# Altium PCB WX0.011.753PCB.PcbDoc
Units mm, origin at the board's own origin, x right, y up, seen from the top; angles counter-clockwise.
Board outline 56.82 x 33.38 mm, 2 copper layers (Top Layer, Bottom Layer); 24 components, 12 nets, 46 pads, 66 vias.
Unrouted connection lines stored in the file: 1.
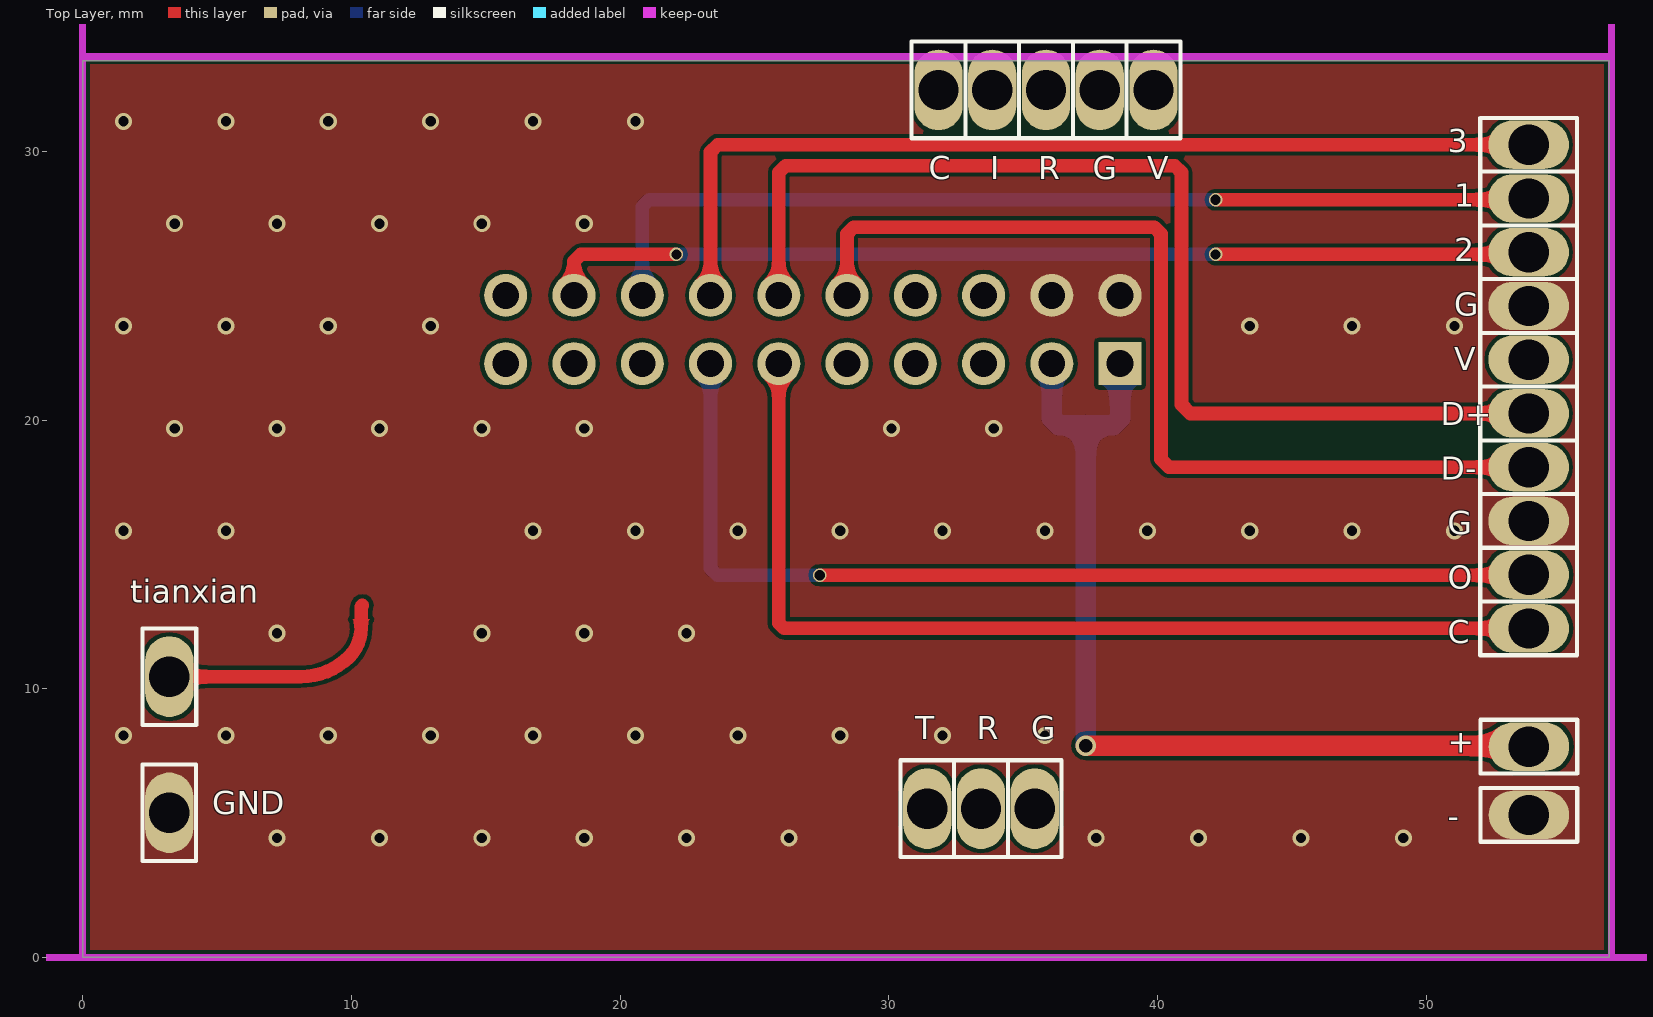
[diagram p0: Top Layer view]
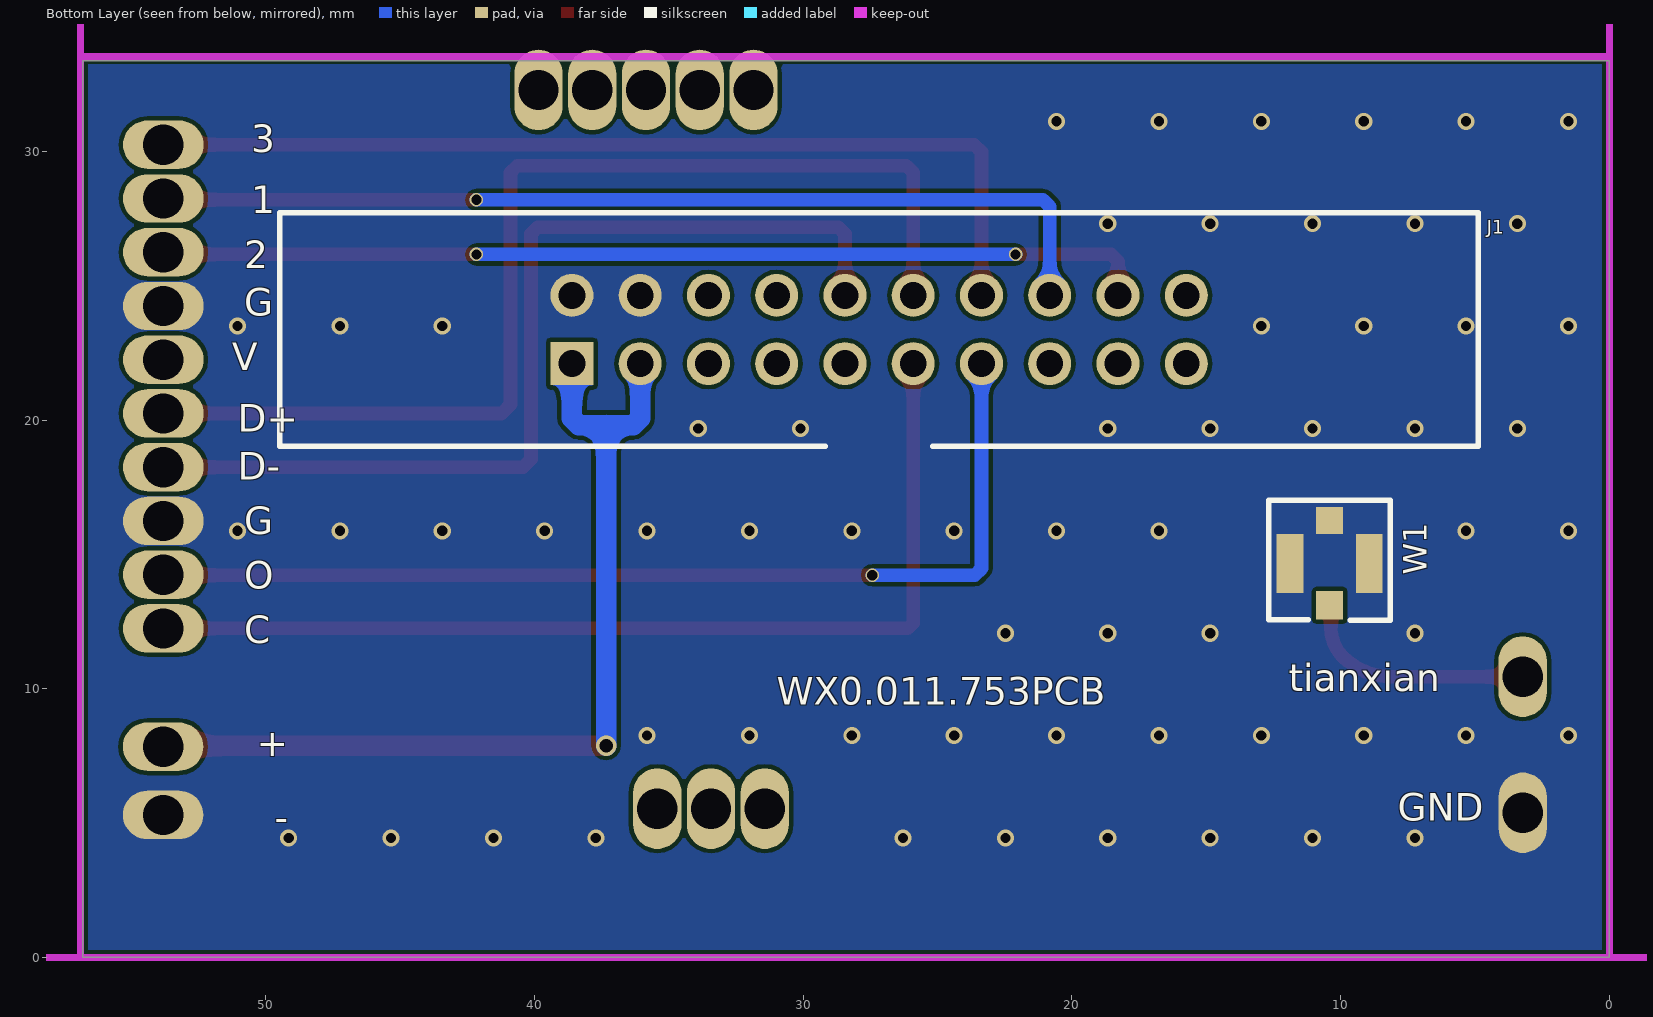
[diagram p1: Bottom Layer view, seen from below]

## Layer stack, top to bottom
Top Solder: solder mask 0.0102, Solder Resist, Dk 3.5
Top Layer: signal copper 0.0356
Dielectric 1: dielectric 0.32, FR-4, Dk 4.8
Bottom Layer: signal copper 0.0356
Bottom Solder: solder mask 0.0102, Solder Resist, Dk 3.5

## Board outline
0,0 0,33.376 56.82,33.376 56.82,0

## Design rules (kind name [scope] priority, off if disabled: settings)
Clearance [All] p1: gap=0.152 ignorepadtopadclearanceinfootprint=TRUE
ComponentClearance [All] p1 off: gap=0.254 collisioncheckmode=3 verticalgap=0.254 showdistances=FALSE
HoleToHoleClearance [All] p1: gap=0.025 allowstackedmicrovias=TRUE
MinimumSolderMaskSliver [All] p1: minsoldermaskwidth=0
PlaneClearance [All] p1: clearance=0.203
PlaneConnect [All] p1: planeconnectstyle=Direct reliefexpansion=0.508 reliefentries=4 reliefconductorwidth=0.254 reliefairgap=0.254
PolygonConnect [All] p1: connectstyle=Direct reliefconductorwidth=0.254 reliefentries=4 polygonreliefangle="90 Angle" airgapwidth=0.254
RoutingVias [All] p1: holewidth=0.381 width=0.508 viastyle="Through Hole" minholewidth=0.152 minwidth=0.203 maxholewidth=1.016 maxwidth=2.54
SilkToSilkClearance [All] p1: silktosilkclearance=0
SilkToSolderMaskClearance [IsPad] p1: minsilkscreentomaskgap=0 clearancetoexposedcopper=TRUE
SolderMaskExpansion [IsVia] p1: expansion=0.102
Width vcc [InNet('No Net')] p1: maxlimit=3.81 minlimit=0.762 preferedwidth=0.889
Width [All] p2: maxlimit=3.81 minlimit=0.127 preferedwidth=0.381
23 further rules are at their usual default settings.

## Components (designator, comment, footprint, x,y, rotation, side; value= is the part's Value field where it differs from the comment)
1 "Test Point" TP5#1 53.814,28.244 r270 top (schematic designator TP3)
2 "Test Point" TP5#2 53.814,26.244 r270 top (schematic designator TP3)
3 "Test Point" TP5#3 53.814,30.244 r270 top (schematic designator TP3)
+ "Test Point" TP5#4 53.821,7.844 r270 top (schematic designator TP3)
- "Test Point" TP5#4 53.821,5.304 r270 top (schematic designator TP3)
C "Test Point" TP5#3 53.814,12.244 r270 top (schematic designator TP3)
C "Test Point" TP5#4 31.853,32.283 r0 top (schematic designator TP3)
D+ "Test Point" TP5#4 53.814,20.244 r270 top (schematic designator TP3)
D- "Test Point" TP5#5 53.814,18.244 r270 top (schematic designator TP3)
G "Test Point" TP5#4 35.433,5.537 r0 top (schematic designator TP3)
G "Test Point" TP5#2 53.814,16.244 r270 top (schematic designator TP3)
G "Test Point" TP5#5 53.814,24.244 r270 top (schematic designator TP3)
G "Test Point" TP5#4 37.853,32.283 r0 top (schematic designator TP3)
GND "Test Point" TP5#4 3.226,5.385 r0 top (schematic designator TP3)
I "Test Point" TP5#4 33.853,32.283 r0 top (schematic designator TP3)
J1 "DC254_2*10" DC254_2*10 27.178,23.368 r90 bottom
O "Test Point" TP5#1 53.814,14.244 r270 top (schematic designator TP3)
R "Test Point" TP5#4 33.433,5.537 r0 top (schematic designator TP3)
R "Test Point" TP5#4 35.853,32.283 r0 top (schematic designator TP3)
T "Test Point" TP5#4 31.433,5.537 r0 top (schematic designator TP3)
tianxian "Test Point" TP5#4 3.231,10.448 r0 top (schematic designator TP3)
V "Test Point" TP5#4 53.814,22.244 r270 top (schematic designator TP3)
V "Test Point" TP5#4 39.853,32.283 r0 top (schematic designator TP3)
W1 "ANT-IPEX" ANT-IPEX 10.414,13.105 r180 bottom

## Footprints (in the part's own frame and the unit in brackets; to place one, negate y for a bottom-side part, rotate by r counter-clockwise, add the part's x,y. Pads: shape width x height; smd on the part's side, far side on the other; paste and mask are expansions set on the pad)
ANT-IPEX [mm] "IPX天线座"
  rect 1x1.05 smd: 1(0,0)
  rect 1x2.2 smd: 2(-1.475,1.55) 2(1.475,1.55)
  rect 1x1 smd: 2(0,3.151)
  silkscreen extent -2.26,-0.56 2.26,3.9
DC254_2*10 [mm]
  rect 1.6x1.6 hole 1: 1(-1.27,11.43)
  round 1.6 hole 1: 2(1.27,11.43) 3(-1.27,8.89) 4(1.27,8.89) 5(-1.27,6.35) 6(1.27,6.35) 7(-1.27,3.81) 8(1.27,3.81) 9(-1.27,1.27) 10(1.27,1.27) 11(-1.27,-1.27) 12(1.27,-1.27) 13(-1.27,-3.81) 14(1.27,-3.81) 15(-1.27,-6.35) 16(1.27,-6.35) 17(-1.27,-8.89) 18(1.27,-8.89) 19(-1.27,-11.43) 20(1.27,-11.43)
  silkscreen extent -4.35,-22.3 4.35,22.3
TP5#1 [mm]
  oval 1.8x3 hole 1.5: 4(0,0)
  silkscreen extent -1,-1.8 1,1.8
TP5#2 [mm]
  oval 1.8x3 hole 1.5: 3(0,0)
  silkscreen extent -1,-1.8 1,1.8
TP5#3 [mm]
  oval 1.8x3 hole 1.5: 5(0,0)
  silkscreen extent -1,-1.8 1,1.8
TP5#4 [mm]
  oval 1.8x3 hole 1.5: 1(0,0)
  silkscreen extent -1,-1.8 1,1.8
TP5#5 [mm]
  oval 1.8x3 hole 1.5: 2(0,0)
  silkscreen extent -1,-1.8 1,1.8

## Part data
1 2 3 + - C C D+ D- G G G G GND I O R R T tianxian V V: library part "Test Point  PASS", "测试点"
J1: library part 1010902-0139, "DC2 2.54mm 2x10pin,2.54mm间距，2x10pin，32×8.55×27.5mm,母头,双排,双排牛角座", Part Name=DC牛角座, ID=4, Part Number=1010902-0139, SMD/DIP=DIP
W1: library part 1010902-0053, "IPEX，配GPRS天线转接线"

## Via types
v1: diameter 0.635, hole 0.381, Top Layer to Bottom Layer, tented both sides, 61 vias
v2: diameter 0.508, hole 0.381, Top Layer to Bottom Layer, tented both sides, 4 vias
v3: diameter 0.762, hole 0.508, Top Layer to Bottom Layer, tented both sides, 1 vias

## Nets (pads, with @x,y where several pads share a name; then routed paths per layer and width w, separated by ;. In a path a pad name is that pad's centre, name@x,y a point inside that pad or via, vN(x,y) a via of type N, cw(c..) or ccw(c..) an arc to the next point about the centre after c; other vN are vias at no path point)
3.6V: +.1 J1.1 J1.3 | length 35.2
  Top Layer w0.762: v3(37.338,7.874) 53.791,7.874 +.1
  Bottom Layer w0.762: J1.3 36.068,20.066 36.322,19.812 37.338,19.812 ; v3(37.338,7.874) 37.338,19.812 ; J1.1 38.608,20.066 38.354,19.812 37.338,19.812
Check: 3.5 J1.14 | length 35.9
  Top Layer w0.508: J1.14 23.368,29.972 23.64,30.244 3.5
CLOSE: C.5 J1.11 | length 37.6
  Top Layer w0.508: J1.11 25.908,12.446 26.11,12.244 C.5
"COUNT A": 2.3 J1.18 | length 36.9
  Top Layer w0.508: J1.18 18.288,25.908 18.542,26.162 v2(22.098,26.162) ; v2(42.164,26.162) 53.732,26.162 2.3
  Bottom Layer w0.508: v2(22.098,26.162) v2(42.164,26.162)
"COUNT B": 1.4 J1.16 | length 36.4
  Top Layer w0.508: v2(42.164,28.194) 53.764,28.194 1.4
  Bottom Layer w0.508: J1.16 20.828,27.94 21.082,28.194 v2(42.164,28.194)
DRV+: D+.1 J1.12 | length 41.5
  Top Layer w0.508: J1.12 25.908,29.21 26.162,29.464 40.64,29.464 40.894,29.21 40.894,20.574 41.224,20.244 D+.1
DRV-: D-.2 J1.10 | length 36.9
  Top Layer w0.508: J1.10 28.448,26.924 28.702,27.178 39.878,27.178 40.132,26.924 40.132,18.542 40.43,18.244 D-.2 54.068,18.244 D-.2@53.77,18.288
GND: -.1 G.2 G.3 GND.1 J1.2 J1.4 W1.2
  other v1: 7.239,4.445 11.049,4.445 14.859,4.445 18.669,4.445 22.479,4.445 26.289,4.445 37.719,4.445 41.529,4.445 45.339,4.445 49.149,4.445 1.524,8.255 5.334,8.255 9.144,8.255 12.954,8.255 16.764,8.255 20.574,8.255 24.384,8.255 28.194,8.255 32.004,8.255 35.814,8.255 7.239,12.065 14.859,12.065 18.669,12.065 22.479,12.065 1.524,15.875 5.334,15.875 16.764,15.875 20.574,15.875 24.384,15.875 28.194,15.875 32.004,15.875 35.814,15.875 39.624,15.875 43.434,15.875 47.244,15.875 51.054,15.875 3.429,19.685 7.239,19.685 11.049,19.685 14.859,19.685 18.669,19.685 30.099,19.685 33.909,19.685 1.524,23.495 5.334,23.495 9.144,23.495 12.954,23.495 43.434,23.495 47.244,23.495 51.054,23.495 3.429,27.305 7.239,27.305 11.049,27.305 14.859,27.305 18.669,27.305 1.524,31.115 5.334,31.115 9.144,31.115 12.954,31.115 16.764,31.115 20.574,31.115
OPEN: J1.13 O.4 | length 38.2
  Top Layer w0.508: v2(27.432,14.224) 53.794,14.224 O.4
  Bottom Layer w0.508: J1.13 23.368,14.478 23.622,14.224 v2(27.432,14.224)
RXD: J1.19
tianxian: tianxian.1 W1.1 | length 8.9
  Top Layer w0.508: tianxian.1 8.126,10.448 ccw(c8.126,12.988) 9.922,11.192 ccw(c8.853,12.261) 10.365,12.261 10.365,12.987 cw(c10.532,12.987) 10.414,13.105
TXD: J1.17
pads on no net: C.1 G.1 I.1 J1.5 J1.6 J1.7 J1.8 J1.9 J1.15 J1.20 R.1 T.1 V.1

## Polygon pours and split planes (outlines as drawn)
GND on Top Layer "Top Layer-No Net" (solid, remove dead copper, pour order 36): 0,0 0,33.376 56.82,33.376 56.82,0
GND on Bottom Layer "Top Layer-No Net1" (solid, remove dead copper, pour order 37): 0,0 0,33.376 56.82,33.376 56.82,0

## Keep-outs
Keep-Out Layer:
  lines w0.254: 0,0 56.896,0 ; 0,0 0,33.528 ; 0,0 -8.636,0 -8.636,134.112 0,134.112 ; 0,33.528 56.896,33.528 ; 0,33.528 0,67.056 ; 0,33.528 56.896,33.528 ; 0,67.056 56.896,67.056 ; 0,67.056 0,100.584 ; 0,67.056 56.896,67.056 ; 0,100.584 56.896,100.584 ; 0,100.584 0,134.112 ; 0,100.584 56.896,100.584 ; 0,134.112 56.896,134.112 ; 56.896,0 64.77,0 64.77,134.112 56.896,134.112 ; 56.896,0 56.896,33.528 ; 56.896,0 56.896,33.528 ; 56.896,33.528 56.896,67.056 ; 56.896,33.528 56.896,67.056 ; 56.896,67.056 56.896,100.584 ; 56.896,67.056 56.896,100.584 ; 56.896,100.584 56.896,134.112 ; 56.896,100.584 56.896,134.112

## Silkscreen, mask and mechanical layers (free items; w line width, h text height)
Bottom Overlay:
  text "3" at 50.546,29.972 h1.02
  text "1" at 50.546,27.686 h1.02
  text "2" at 50.8,25.654 h1.02
  text "G" at 50.8,23.876 h1.02
  text "V" at 50.292,21.844 h1.02
  text "D+" at 51.054,19.558 h1.02
  text "D-" at 51.054,17.78 h1.02
  text "G" at 50.8,15.748 h1.02
  text "O" at 50.8,13.716 h1.02
  text "C" at 50.8,11.684 h1.02
  text "tianxian" at 11.938,9.906 h1.02
  text "WX0.011.753PCB" at 30.988,9.398 h1.02
  text "+" at 49.174,7.481 h1.02
  text "GND" at 7.874,5.08 h1.02
  text "-" at 49.174,4.687 h1.02